# Altium PCB MK76_HOST__B.pcbdoc (part 2 of 2)
Units mil, origin at the board's own origin, x right, y up, seen from the top; angles counter-clockwise.
Board outline 6000 x 6000 mil, 4 copper layers (Top Layer, GND-SIG1, GND-SIG2, Bottom Layer), stack 61.156 mil thick; 71 components, 104 nets, 530 pads, 76 vias.
Unrouted connection lines stored in the file: 214.
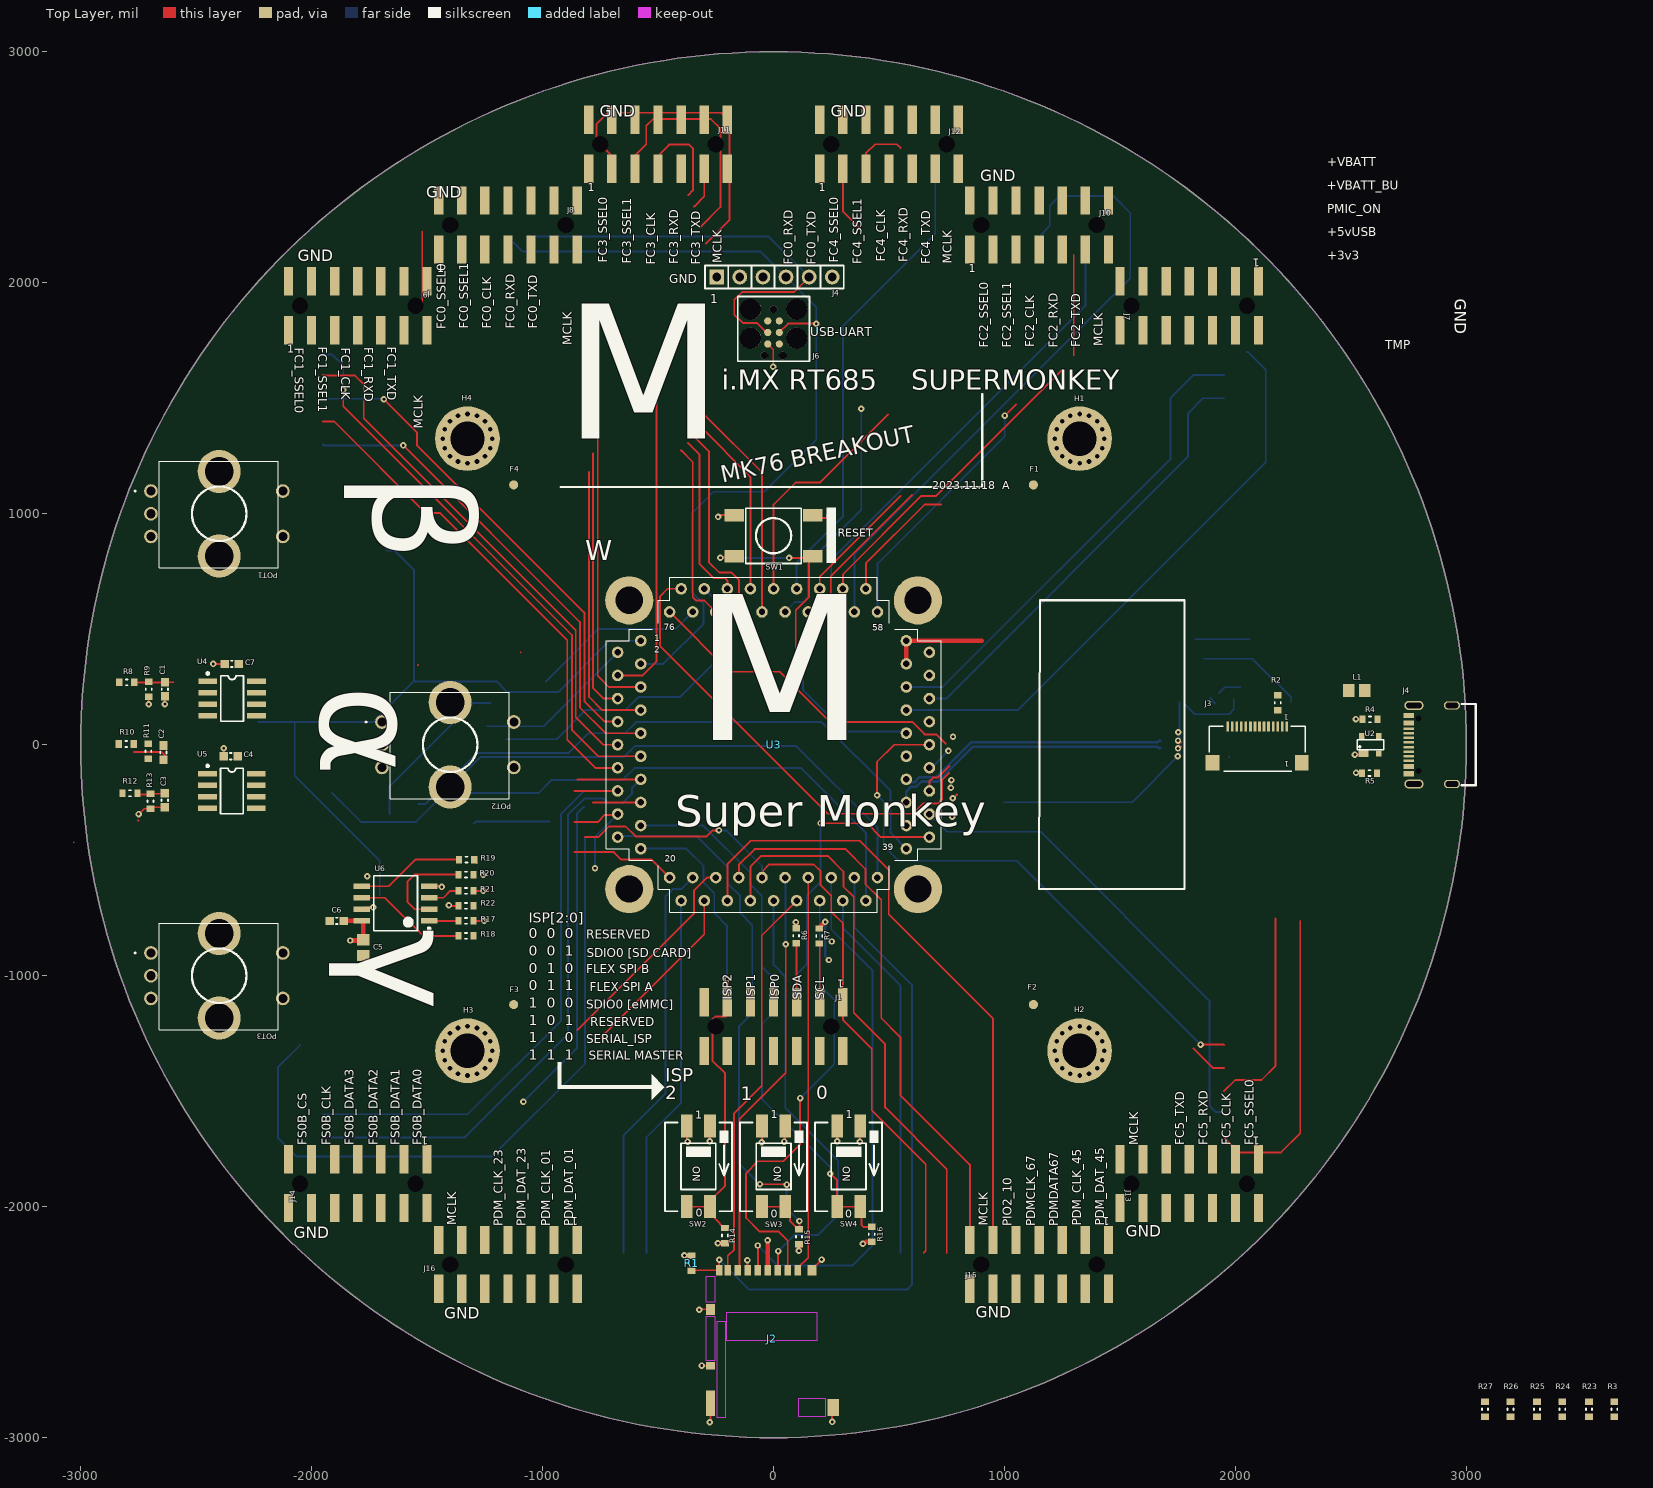
[diagram p0: Top Layer view]

## Via types
v1: diameter 28, hole 12, Top Layer to Bottom Layer, tented both sides, 76 vias

## Nets (pads, with @x,y where several pads share a name; then routed paths per layer and width w, separated by ;. In a path a pad name is that pad's centre, name@x,y a point inside that pad or via, vN(x,y) a via of type N, cw(c..) or ccw(c..) an arc to the next point about the centre after c; other vN are vias at no path point) (continued)
copper on no net: (continued)
  Top Layer w8: -1521,1904 -1521,2223 ; 1300,1685 1300,2120 ; 1950,-1700 2015,-1765 2197,-1765 2280,-1682 2280,-1498 2280,-763
  Bottom Layer w6: 1824.24,456.76 2061.26,456.76 ; 1863,373 2073,373 2241,205 2241,183.03

## Polygon pours and split planes (outlines as drawn)
GND on GND-SIG2 "GND_L03_P000" (solid, remove dead copper, pour order 0): -3318,-3311 4648,-3311 4648,3547 -3318,3547 -3318,3292
GND on GND-SIG1 "GND_L02_P001" (solid, remove dead copper, pour order 1): -3045,-3183 4355,-3183 4355,3182 -3045,3182

## Keep-outs
Keep-Out Layer:
  the board outline again, w1

## Silkscreen, mask and mechanical layers (free items; w line width, h text height)
Top Overlay:
  rectangle: 230,786 270,1027
  region: -525,-1475 -920,-1475 -920,-1375 -935,-1375 -935,-1490 -525,-1490
  region: -472.5,-1482.5 -527.5,-1427.5 -527.5,-1537.5
  lines w10: -921,1116 904,1116 904,1517 ; 1149,-625 1779,-625 1779,625 1154,625 1149,-625
  text "GND" at -753,2700.83 h85
  text "GND" at 247,2700.83 h85
  text "+VBATT" at 2397,2490.53 h65
  text "GND" at 895,2421.83 h85
  text "+VBATT_BU" at 2395,2388.71 h65
  text "GND" at -1503,2350.83 h85
  text "PMIC_ON" at 2397,2288.1 h65
  text "+5vUSB" at 2397,2188.16 h65
  text "FC4_CLK" at 495.9,2090 h65 r90
  text "FC4_RXD" at 593.9,2088 h65 r90
  text "+3v3" at 2397,2087.16 h65
  text "FC3_SSEL0" at -707.1,2086 h65 r90
  text "FC4_SSEL0" at 293.9,2086 h65 r90
  text "MCLK" at -211.49,2084 h65 r90
  text "MCLK" at 784.51,2083 h65 r90
  text "FC3_SSEL1" at -603.1,2082 h65 r90
  text "FC3_RXD" at -400.1,2081 h65 r90
  text "FC4_TXD" at 691.9,2081 h65 r90
  text "FC4_SSEL1" at 395.9,2080 h65 r90
  text "FC3_CLK" at -498.1,2078 h65 r90
  text "FC3_TXD" at -305.1,2078 h65 r90
  text "FC0_RXD" at 95.9,2078 h65 r90
  text "FC0_TXD" at 195.9,2077 h65 r90
  text "GND" at -2060,2075.83 h85
  text "GND" at -451.53,1985.16 h65
  text "GND" at 2932.83,1931 h85 r270
  text "1" at -273.27,1898.16 h65
  text "FC0_CLK" at -1209.1,1801 h65 r90
  text "FC0_TXD" at -1010.1,1801 h65 r90
  text "FC0_SSEL1" at -1308.1,1800 h65 r90
  text "FC0_RXD" at -1107.1,1800 h65 r90
  text "FC0_SSEL0" at -1407.1,1799 h65 r90
  text "USB-UART" at 159.8,1755.16 h65
  text "MCLK" at -859.6,1729.94 h65 r90
  text "MCLK" at 1437.4,1724.94 h65 r90
  text "FC1_SSEL1" at -1984.9,1724 h65 r270
  text "FC1_TXD" at -1685.9,1722 h65 r270
  text "FC1_RXD" at -1783.9,1721 h65 r270
  text "FC2_CLK" at 1141.9,1720 h65 r90
  text "FC2_TXD" at 1341.9,1720 h65 r90
  text "FC1_SSEL0" at -2085.9,1719 h65 r270
  text "FC2_SSEL0" at 941.9,1719 h65 r90
  text "FC2_SSEL1" at 1042.9,1719 h65 r90
  text "FC2_RXD" at 1242.9,1719 h65 r90
  text "FC1_CLK" at -1883.9,1718 h65 r270
  text "TMP" at 2648.25,1698.16 h65
  text "i.MX RT685    SUPERMONKEY" at -224.81,1506.25 h150
  text "MCLK" at -1505.49,1369 h65 r90
  text "M" at -22087.8,1321.01 h500
  text "β" at -1876.74,1177 h750 r270
  text "M" at -909,1134.68 h1000
  text "MK76 BREAKOUT" at -216.58,1110.98 h125 r12
  text "2023.11.18  A" at 686.72,1092.43 h60
  text "RESET" at 279,886.69 h60
  text "W" at -815.62,769 h150
  text "α" at -2106.4,257.52 h750 r270
  text "ISP[2:0]" at -1060,-785 h75
  text "γ" at -1941.74,-795.91 h750 r270
  text "0  0  0" at -1059,-854 h75
  text "RESERVED" at -810,-853.8 h65
  text "0  0  1" at -1059,-929 h75
  text "SDIO0 [SD CARD]" at -807.86,-932.5 h65
  text "FLEX SPI B" at -811,-1002.8 h65
  text "0  1  0" at -1059,-1004 h75
  text "0  1  1" at -1059,-1079 h75
  text "FLEX SPI A" at -795.49,-1080.5 h65
  text "ISP2" at -168,-1105 h65 r90
  text "ISP1" at -67,-1105 h65 r90
  text "ISP0" at 37,-1105 h65 r90
  text "SDA" at 135,-1105 h65 r90
  text "SCL" at 233,-1105 h65 r90
  text "1  0  0" at -1059,-1154 h75
  text "SDIO0 [eMMC]" at -810,-1156.5 h65
  text "1  0  1" at -1059,-1229 h75
  text "RESERVED" at -793.51,-1232.5 h65
  text "1  1  0" at -1059,-1304 h75
  text "SERIAL_ISP" at -810,-1305.5 h65
  text "SERIAL MASTER" at -800.81,-1377.5 h65
  text "1  1  1" at -1059,-1379 h75
  text "ISP" at -469,-1478.43 h100
  text "2" at -468.57,-1554.66 h100
  text "0" at 184,-1555.38 h100
  text "1" at -142.57,-1557.66 h100
  text "1" at -11,-1629 h60
  text "1" at 312,-1630 h60
  text "1" at -338,-1632 h60
  text "FS0B_CS" at -2008.1,-1735 h65 r90
  text "FS0B_CLK" at -1905,-1735 h65 r90
  text "FS0B_DATA3" at -1805,-1735 h65 r90
  text "FS0B_DATA2" at -1700,-1735 h65 r90
  text "FS0B_DATA1" at -1605,-1735 h65 r90
  text "FS0B_DATA0" at -1510,-1735 h65 r90
  text "MCLK" at 1591.51,-1735 h65 r90
  text "FC5_TXD" at 1791.9,-1735 h65 r90
  text "FC5_RXD" at 1891.9,-1735 h65 r90
  text "FC5_CLK" at 1991.9,-1735 h65 r90
  text "FC5_SSEL0" at 2091.9,-1735 h65 r90
  text "0" at -337,-2057.34 h60
  text "0" at -11,-2060.34 h60
  text "0" at 311,-2061.34 h60
  text "MCLK" at -1361.19,-2081.19 h65 r90
  text "PDM_CLK_45" at 1345,-2082.03 h65 r90
  text "PDM_DAT_45" at 1445,-2082.03 h65 r90
  text "MCLK" at 941,-2083 h65 r90
  text "PDM_CLK_23" at -1159.4,-2084.4 h65 r90
  text "PDM_DAT_23" at -1059.13,-2084.13 h65 r90
  text "PDM_CLK_01" at -954.4,-2084.4 h65 r90
  text "PDM_DAT_01" at -854.13,-2084.13 h65 r90
  text "PIO2_10" at 1045,-2085 h65 r90
  text "PDMCLK_67" at 1145,-2085 h65 r90
  text "PDMDATA67" at 1245,-2085 h65 r90
  text "GND" at 1524.18,-2148.17 h85
  text "GND" at -2077.5,-2153.17 h85
  text "GND" at 875.72,-2498.17 h85
  text "GND" at -1424.78,-2503.17 h85
Bottom Overlay:
  circle w100: c0,-10 r2950
Board Outline:
  circle w1: c0,0 r3000

## Text inside footprints (layer, text, board x,y; h text height)
J1: Top Overlay "1" at 305.12,-1003.46 h60 r180
J2: Mechanical 1 "LOCK" at -291.73,-2974.8 h9.84; Mechanical 1 "OVERSTROKE" at -349.8,-2944.29 h9.84; Mechanical 1 "CARD EJECT" at -345.87,-3132.28 h9.84
J3: Top Overlay "1" at 2233.74,-62.73 h40 r180; Top Overlay "1" at 2229.81,138.06 h40 r180
J7: Top Overlay "1" at 2105.12,2116.54 h60 r180
J8: Top Overlay "1" at -1455.12,2033.46 h60
J9: Top Overlay "1" at -2105.12,1683.46 h60
J10: Top Overlay "1" at 844.88,2033.46 h60
J11: Top Overlay "1" at -805.12,2383.46 h60
J12: Top Overlay "1" at 194.88,2383.46 h60
J13: Top Overlay "1" at 2105.12,-1683.46 h60 r180
J14: Top Overlay "1" at -1494.88,-1683.46 h60 r180
J15: Top Overlay "1" at 1455.12,-2033.46 h60 r180
J16: Top Overlay "1" at -844.88,-2033.46 h60 r180
SW2: Top Overlay "ON" at -350,-1825 h32 r270
SW3: Top Overlay "ON" at 0,-1825 h32 r270
SW4: Top Overlay "ON" at 300,-1825 h32 r270
U3: Top Overlay "Super Monkey" at -425.2,-401.57 h236.22; Top Overlay "M" at 401.57,-204.72 h1181.1; Top Overlay "58" at 427,483 h50; Top Overlay "39" at 470,-468 h50; Top Overlay "76" at -475,484 h50; Top Overlay "20" at -470,-518 h50; Top Overlay "2" at -517,388 h50; Top Overlay "1" at -516,437 h50; Bottom Overlay "M" at -431.5,-200 h1181.1; Bottom Overlay "Super Monkey" at 393.7,-401.57 h236.22; Bottom Overlay "58" at 470,483 h50; Bottom Overlay "39" at 516,-470 h50; Bottom Overlay "76" at -429,484 h50; Bottom Overlay "20" at -428,-518 h50; Bottom Overlay "2" at -616,382 h50; Bottom Overlay "1" at -525,437 h50